# Altium PCB Preamp.PcbDoc
Units mm, origin at the board's own origin, x right, y up, seen from the top; angles counter-clockwise.
Board outline 41 x 29 mm, 2 copper layers (Top Layer, Bottom Layer); 41 components, 30 nets, 146 pads, 38 vias.
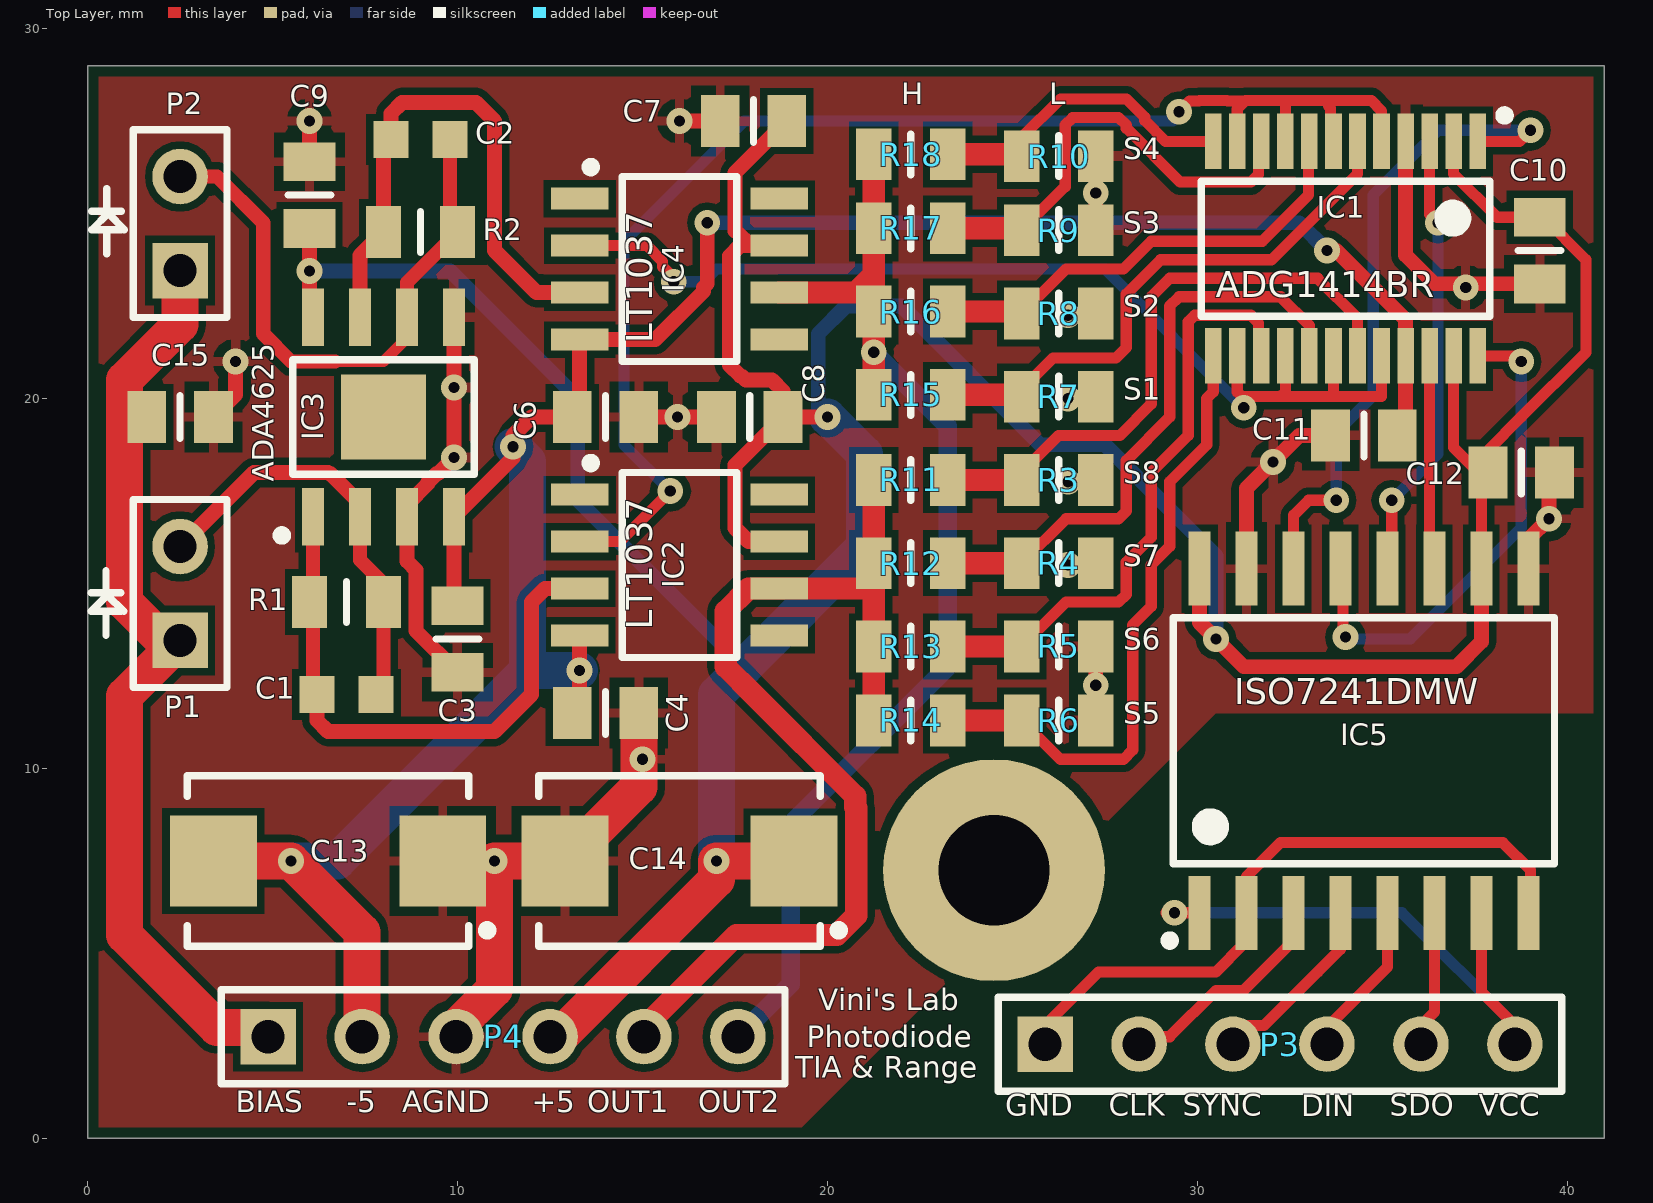
[diagram p0: Top Layer view]
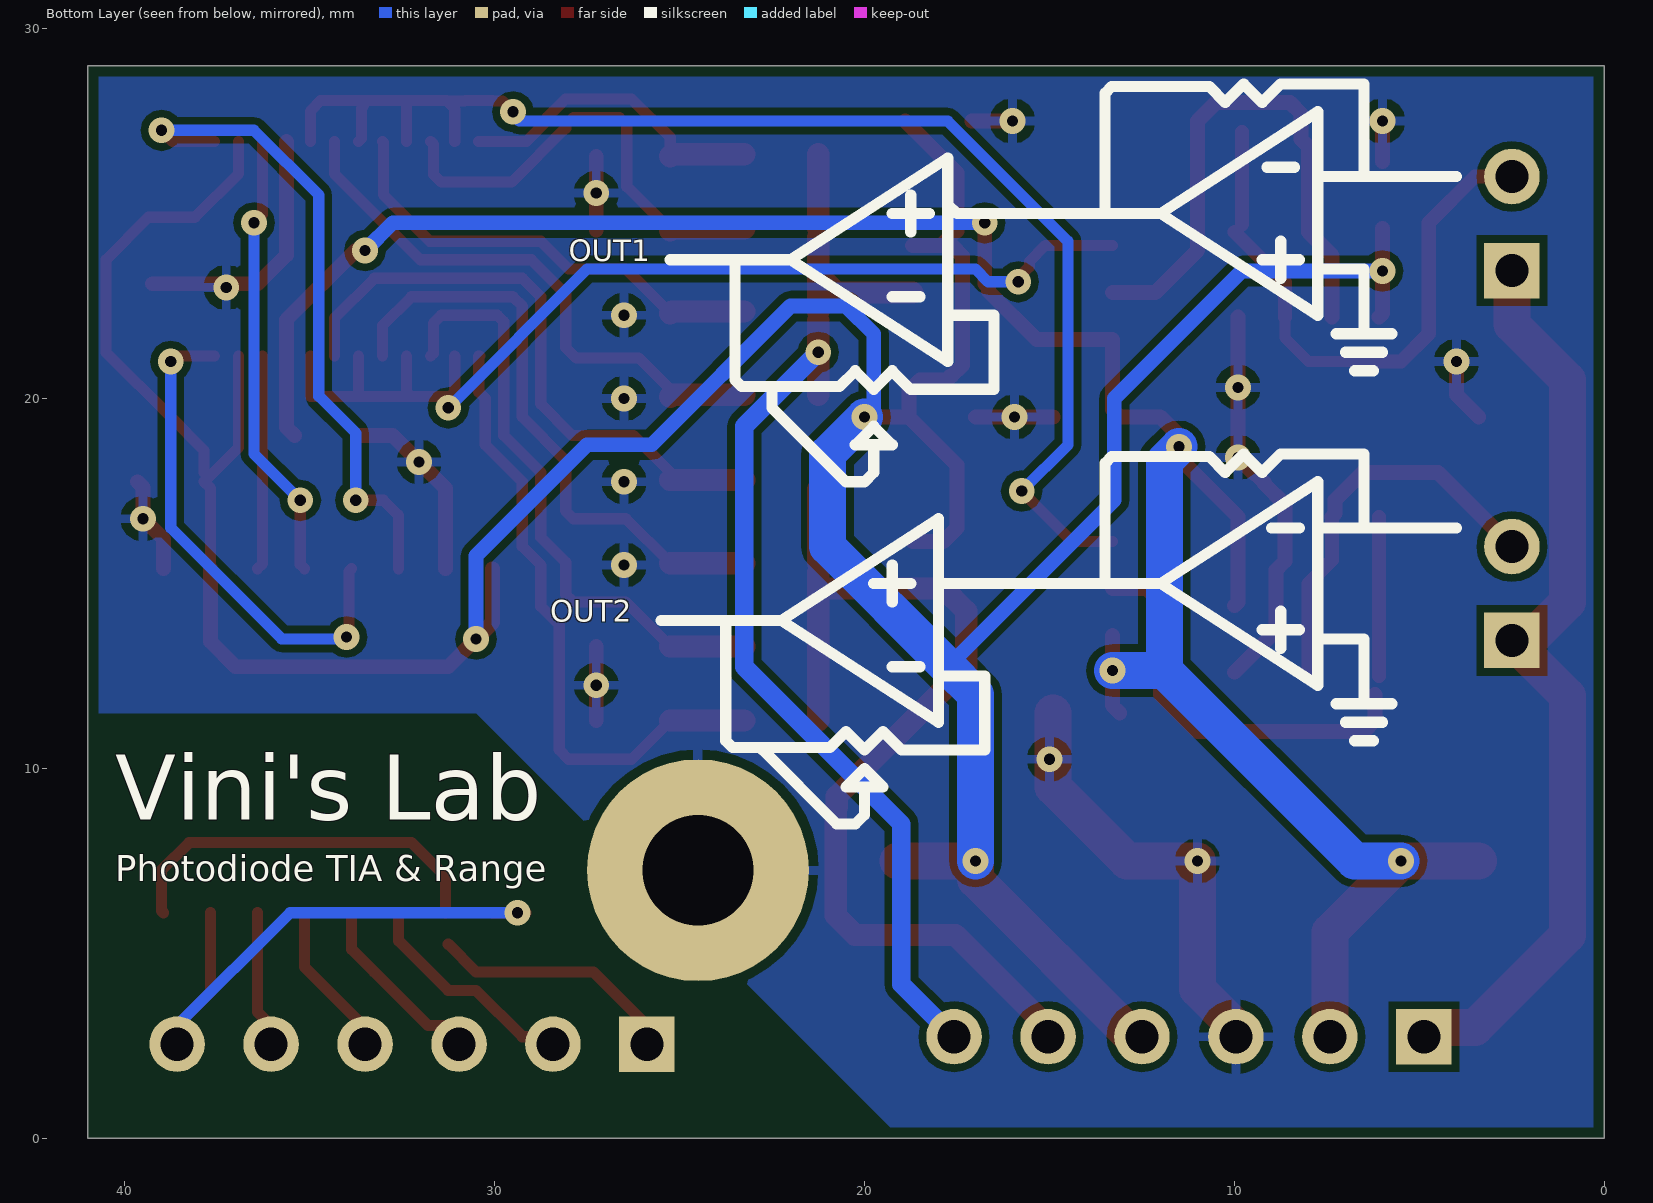
[diagram p1: Bottom Layer view, seen from below]
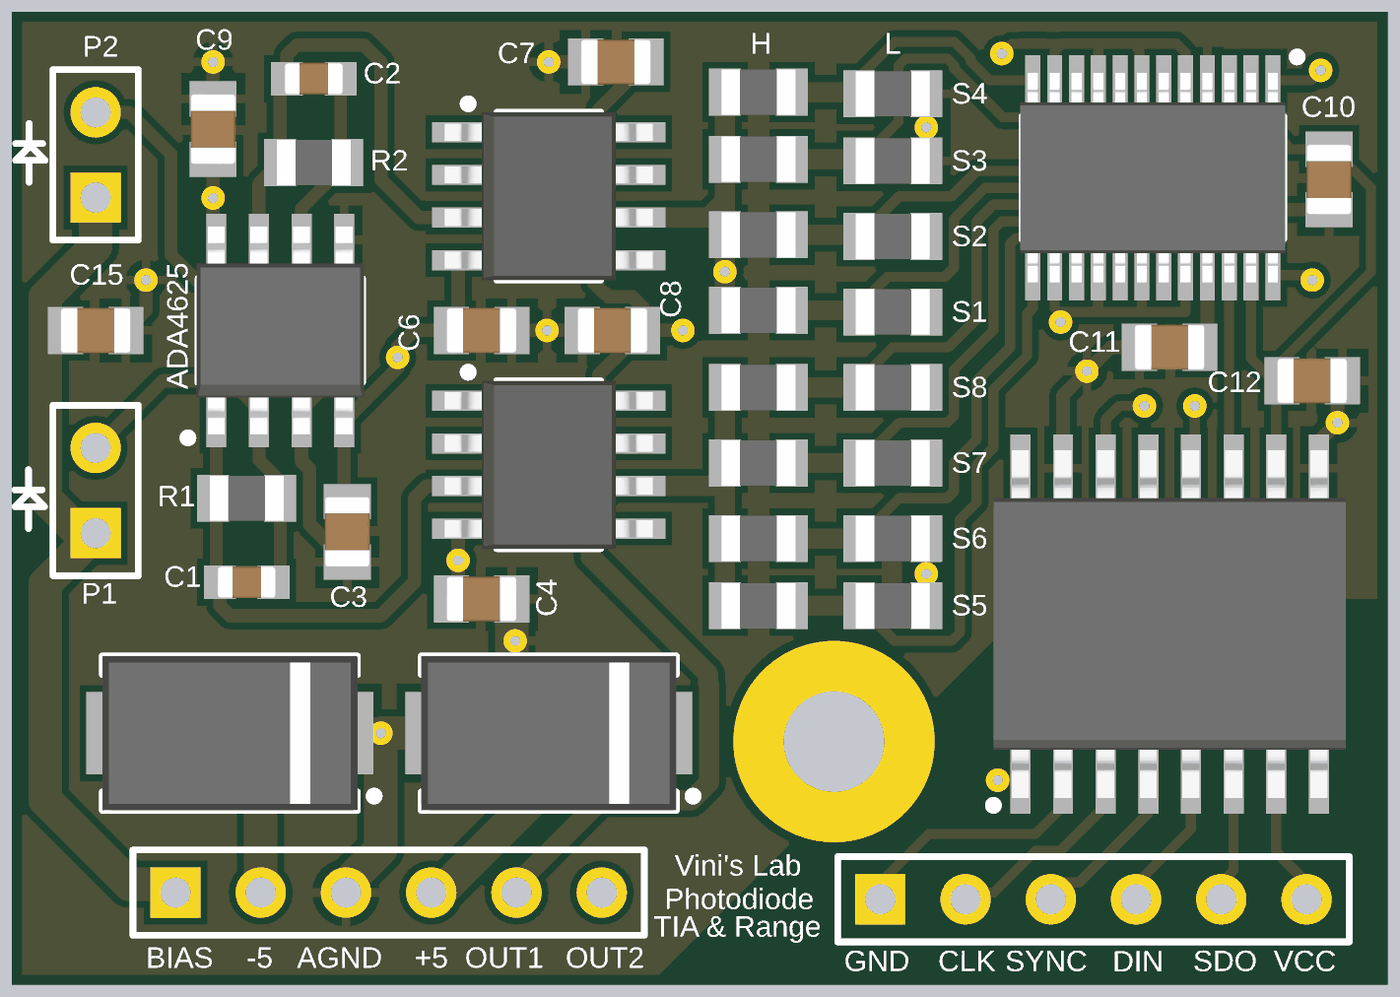
[diagram p2: 3D render of the assembled board from above, using the file's embedded part models]

## Layer stack, top to bottom
Top Solder: solder mask 0.0102, Solder Resist, Dk 3.5
Top Layer: signal copper 0.0356
Dielectric 1: dielectric 0.32, FR-4, Dk 4.8
Bottom Layer: signal copper 0.0356
Bottom Solder: solder mask 0.0102, Solder Resist, Dk 3.5

## Board outline
0,0 0,29 41,29 41,0

## Design rules (kind name [scope] priority, off if disabled: settings)
BoardOutlineClearance [All] p1: gap=0.3 ignorepadtopadclearanceinfootprint=FALSE
Clearance [All] p1: gap=0.2 ignorepadtopadclearanceinfootprint=FALSE
PolygonConnect [All] p1: connectstyle=Relief reliefconductorwidth=0.254 reliefentries=4 polygonreliefangle="90 Angle" airgapwidth=0.254
RoutingVias [All] p1: holewidth=0.711 width=1.27 viastyle="Through Hole" minholewidth=0.711 minwidth=1.27 maxholewidth=0.711 maxwidth=1.27
SolderMaskExpansion [All] p1: expansion=0 istentingtop=FALSE
Width [All] p1: maxlimit=1 minlimit=0.3 preferedwidth=0.4
30 further rules are at their usual default settings.

## Components (designator, comment, footprint, x,y, rotation, side; value= is the part's Value field where it differs from the comment)
C1 "1.2pF" CAPC1608X87N 7,12 r180 top
C2 "1.2pF" CAPC1608X87N 9,27 r180 top
C3 "100nF" CAPC2012X135N 10,13.5 r90 top
C4 "100nF" CAPC2012X135N 14,11.5 r180 top
C6 "100nF" CAPC2012X135N 14,19.5 r180 top
C7 "100nF" CAPC2012X135N 18,27.5 r0 top
C8 "100nF" CAPC2012X135N 17.9,19.5 r0 top
C9 "100nF" CAPC2012X135N 6,25.5 r270 top
C10 "100nF" CAPC2012X135N 39.25,24 r90 top
C11 "100nF" CAPC2012X135N 34.5,19 r0 top
C12 "100nF" CAPC2012X135N 38.75,18 r180 top
C13 "10uF" CAPMP7343X310N 6.5,7.5 r180 top
C14 "10uF" CAPMP7343X310N 16,7.5 r180 top
C15 "100nF" CAPC2012X135N 2.5,19.5 r0 top
IC1 "ADG1414BRUZ" SOP65P640X120-24N 34,24.05 r270 top
IC2 "LT1007CS8#PBF" SOIC127P600X175-8N 16,15.5 r0 top
IC3 "ADA4625-2ARDZ" SOIC127P600X175-9N-S229 8,19.5 r90 top
IC4 "LT1007CS8#PBF" SOIC127P600X175-8N 16,23.5 r0 top
IC5 "ISO7241MDW" SOIC127P1030X265-16N 34.5,10.75 r90 top
P1 "Header 2" HDR1X2 2.5,13.46 r90 top
P2 "Header 2" HDR1X2 2.5,23.46 r90 top
P3 "Header 6" HDR1X6 25.88,2.55 r0 top
P4 "Header 6" HDR1X6 4.88,2.75 r0 top
R1 "1k" RESC2012X60N 7,14.5 r180 top
R2 "1k" RESC2012X60N 9,24.5 r180 top
R3 "1k" RESC2012X60N 26.25,17.8 r0 top
R4 "1k" RESC2012X60N 26.25,15.55 r0 top
R5 "1k" RESC2012X60N 26.25,13.3 r0 top
R6 "1k" RESC2012X60N 26.25,11.3 r0 top
R7 "1k" RESC2012X60N 26.25,20.05 r0 top
R8 "1k" RESC2012X60N 26.25,22.3 r0 top
R9 "1k" RESC2012X60N 26.25,24.55 r0 top
R10 "1k" RESC2012X60N 26.25,26.55 r0 top
R11 "1k" RESC2012X60N 22.25,17.8 r0 top
R12 "1k" RESC2012X60N 22.25,15.55 r0 top
R13 "1k" RESC2012X60N 22.25,13.3 r0 top
R14 "1k" RESC2012X60N 22.25,11.3 r0 top
R15 "1k" RESC2012X60N 22.25,20.1 r0 top
R16 "1k" RESC2012X60N 22.25,22.35 r0 top
R17 "1k" RESC2012X60N 22.25,24.6 r0 top
R18 "1k" RESC2012X60N 22.25,26.6 r0 top

## Footprints (in the part's own frame and the unit in brackets; to place one, negate y for a bottom-side part, rotate by r counter-clockwise, add the part's x,y. Pads: shape width x height; smd on the part's side, far side on the other; paste and mask are expansions set on the pad)
CAPC1608X87N [mm] "Chip Capacitor, Body 1.6x0.8mm IPC Medium Density"
  rect 0.95x1 smd: 1(-0.8,0) 2(0.8,0)
  body extent -0.87,-0.47 0.88,0.48, height 0.87
CAPC2012X135N [mm] "Chip Capacitor, Body 2.0x1.25mm, IPC Medium Density"
  rect 1.05x1.4 smd: 1(-0.9,0) 2(0.9,0)
  silkscreen extent 0,-0.58 0,0.58, body extent -1.05,-0.67 1.05,0.68, height 1.25
CAPMP7343X310N [mm] "Capacitor, Polarized, Molded  Body 7.3x4.3mm, IPC Medium Density"
  rect 2.35x2.45 smd: 1(-3.1,0) 2(3.1,0)
  silkscreen extent -4.43,-2.3 3.8,2.3, body extent -3.8,-2.3 3.8,2.3, height 3.1
HDR1X2 [mm] "Connector; Header; 2 Position"
  rect 1.5x1.5 hole 0.9: 1(0,0)
  round 1.5 hole 0.9: 2(2.54,0)
  silkscreen extent -1.27,-1.27 3.81,1.27
HDR1X6 [mm] "Connector; Header; 6 Position"
  rect 1.5x1.5 hole 0.9: 1(0,0)
  round 1.5 hole 0.9: 2(2.54,0) 3(5.08,0) 4(7.62,0) 5(10.16,0) 6(12.7,0)
  silkscreen extent -1.27,-1.27 13.97,1.27
RESC2012X60N [mm] "Chip Resistor, EIA 0805, Metric 2012, Body 2.0x1.2mm, IPC Medium Density"
  rect 0.95x1.4 smd: 1(-1,0) 2(1,0)
  silkscreen extent 0,-0.55 0,0.55, body extent -1.1,-0.67 1.1,0.68, height 0.6
SOIC127P600X175-8N [mm] "SOIC 8, Pitch 1.27mm - Body 4x5mm, IPC Medium Density"
  rect 1.55x0.6 smd: 1(-2.7,1.905) 2(-2.7,0.635) 3(-2.7,-0.635) 4(-2.7,-1.905) 5(2.7,-1.905) 6(2.7,-0.635) 7(2.7,0.635) 8(2.7,1.905)
  silkscreen extent -2.52,-2.5 1.55,2.88, body extent -3.1,-2.5 3.1,2.5, height 1.75
SOIC127P600X175-9N-S229 [mm] "SOIC 8, 1.27mm Pitch; 8 pin, 3.90mm W X 4.90mm L X 1.75mm H body, (w/thermal tab 2.29mm X 2.29mm), IPC Medium Density"
  rect 1.55x0.6 smd: 1(-2.7,1.905) 2(-2.7,0.635) 3(-2.7,-0.635) 4(-2.7,-1.905) 5(2.7,-1.905) 6(2.7,-0.635) 7(2.7,0.635) 8(2.7,1.905)
  rect 2.29x2.29 smd: 9(0,0)
  silkscreen extent -3.32,-2.45 1.55,2.87, body extent -3.1,-2.5 3.1,2.5, height 1.75
SOIC127P1030X265-16N [mm] "SOIC, 1.27mm Pitch; 16 Pin, 7.50mm W X 10.3mm L X 2.65mm H body, IPC Medium Density"
  rect 2x0.6 smd: 1(-4.65,4.445) 2(-4.65,3.175) 3(-4.65,1.905) 4(-4.65,0.635) 5(-4.65,-0.635) 6(-4.65,-1.905) 7(-4.65,-3.175) 8(-4.65,-4.445) 9(4.65,-4.445) 10(4.65,-3.175) 11(4.65,-1.905) 12(4.65,-0.635) 13(4.65,0.635) 14(4.65,1.905) 15(4.65,3.175) 16(4.65,4.445)
  silkscreen extent -5.52,-5.15 3.32,5.37, body extent -5.18,-5.25 5.18,5.25, height 1.68
SOP65P640X120-24N [mm] "SOP, 0.65mm Pitch; 24 Pin, 4.40mm W X 7.80mm L X 1.20mm H Body, IPC Medium Density"
  rect 1.5x0.45 smd: 1(-2.9,3.575) 2(-2.9,2.925) 3(-2.9,2.275) 4(-2.9,1.625) 5(-2.9,0.975) 6(-2.9,0.325) 7(-2.9,-0.325) 8(-2.9,-0.975) 9(-2.9,-1.625) 10(-2.9,-2.275) 11(-2.9,-2.925) 12(-2.9,-3.575) 13(2.9,-3.575) 14(2.9,-2.925) 15(2.9,-2.275) 16(2.9,-1.625) 17(2.9,-0.975) 18(2.9,-0.325) 19(2.9,0.325) 20(2.9,0.975) 21(2.9,1.625) 22(2.9,2.275) 23(2.9,2.925) 24(2.9,3.575)
  silkscreen extent -3.72,-3.9 1.83,4.43, body extent -3.12,-3.95 3.12,3.95, height 1.2

## Part data
C1 C2: library part CC0603_1.2PF_50V_0.25PF_NP0, "Non-polarised capacitor", Case=0603, Manufacturer=GENERIC, Manufacturer1 ComponentHeight=0.87mm, Manufacturer1 Example=PHYCOMP, Manufacturer1 Part Number=223886715128, Tolerance=±0.25pF, Voltage=50V, Author="CERN DEM JLC", Component Type=Standard, CreateDate=12/3/2007, HelpURL=\\cern.ch\dfs\Applications\Altium\Datasheets\CC0603_NP0_PHYCOMP.pdf, LatestRevisionDate=12/3/2007, Manufacturer Part Number=CC0603_1.2PF_50V_0.25PF_NP0, Mounted=Yes, Part Description="SMD Multilayer Chip Ceramic Capacitor", Part Number=CC0603_1.2PF_50V_0.25PF_NP0, Pin Count=2, Sense=No, SMD=Yes, Socket=No, Status=Preferred, TC=C0G/NP0
C3 C4 C6 C7 C8 C9 C10 C11 C12 C15: library part CC0805_100NF_50V_10%_X7R, "Non-polarised capacitor", Case=0805, Manufacturer=GENERIC, Manufacturer1 ComponentHeight=1mm, Manufacturer1 Example=TDK, Manufacturer1 Part Number=C2012X7R1H104K085AA, Tolerance=±10%, Voltage=50V, Author="CERN DEM JLC", Component Type=Standard, CreateDate=12/3/2007, HelpURL=\\cern.ch\dfs\Applications\Altium\Datasheets\CC0805_X7R_TDK_C.pdf, LatestRevisionDate=4/22/2015, Manufacturer Part Number=CC0805_100NF_50V_10%_X7R, Mounted=Yes, Part Description="SMD Multilayer Chip Ceramic Capacitor", Part Number=CC0805_100NF_50V_10%_X7R, Pin Count=2, Sense=No, SMD=Yes, Socket=No, Status=Preferred, TC=X7R
C13 C14: library part CTE7343-31_10UF_25V_10%, "Polarised capacitor", Case=D, Manufacturer=GENERIC, Manufacturer1 ComponentHeight=3.1mm, Manufacturer1 Example=AVX, Manufacturer1 Part Number=TAJD106K025R, Tolerance=±10%, Voltage=25V, Author="CERN DEM JMW", Component Type=Standard, CreateDate=10/17/2008, HelpURL=\\cern.ch\dfs\Applications\Altium\Datasheets\CTE_AVX_TAJ.pdf, LatestRevisionDate=10/17/2008, Manufacturer Part Number=CTE7343-31_10UF_25V_10%, Mounted=Yes, Part Description="Solid Tantalum Chip Capacitor", Part Number=CTE7343-31_10UF_25V_10%, Pin Count=2, Sense=No, SMD=Yes, Socket=No, Status=Preferred
IC1: "9.5 Ohm ON Resistance, ±15 V/+12 V/±5 V iCMOS,  Serially-Controlled Octal SPST Switches", Case=TSSOP24, Manufacturer="ANALOG DEVICES", Author="CERN DEM MR", Bonding=No, Component Type=Standard, ComponentHeight=1.2mm, CreateDate=10/21/2016, Device=ADG1414BRUZ, HelpURL=\\cern.ch\dfs\Applications\Altium\Datasheets\ADG1414BRUZ.pdf, LatestRevisionDate=10/21/2016, Manufacturer Part Number=ADG1414BRUZ, Mounted=Yes, PackageDescription="SOP, 0.65mm Pitch; 24 Pin, 4.40mm W X 7.80mm L X 1.20mm H body, IPC Medium Density", Part Description="9.5 Ohm ON Resistance, ±15 V/+12 V/±5 V iCMOS,  Serially-Controlled Octal SPST Switches", Part Number=ADG1414BRUZ, Pin Count=24, PressFit=No, Sense=No, SMD=Yes, Socket=No
IC2 IC4: "Operational Amplifier with Offset 1-8", Case=SOIC8, Manufacturer="LINEAR TECHNOLOGY", Author="CERN DEM JLC", Bonding=No, Component Type=Standard, ComponentHeight=1.75mm, CreateDate=3/9/2011, Device=LT1007CS8#PBF, HelpURL=\\cern.ch\dfs\Applications\Altium\Datasheets\LT1007CS8#PBF.pdf, LatestRevisionDate=3/9/2011, Manufacturer Part Number=LT1007CS8#PBF, Mounted=Yes, PackageDescription="SOIC 8, Pitch 1.27mm - Body 4x5mm, IPC Medium Density", Part Description="Low Noise, High Speed Precision Operational Amplifier", Part Number=LT1007CS8#PBF, Pin Count=7, PressFit=No, Sense=No, SMD=Yes, Socket=No
IC3: "Dual Operational Amplifier", Case=SOIC8, Manufacturer="ANALOG DEVICES", Author="CERN DEM BC", Bonding=No, Component Type=Standard, ComponentHeight=1.75mm, CreateDate=10/22/2019, Device=ADA4625-2ARDZ, HelpURL=\\cern.ch\dfs\Applications\Altium\Datasheets\ADA4625-2ARDZ.pdf, LatestRevisionDate=10/22/2019, Manufacturer Part Number=ADA4625-2ARDZ, Mounted=Yes, PackageDescription="SOIC, 1.27mm Pitch; 8 Pin, 3.90mm W X 4.90mm L X 1.75mm H body (w/Thermal Tab 2.29 X 2.29mm), IPC Medium Density", Part Description="Dual, 36V, 18MHz, Low Noise, Fast Settling, Single Supply, RRO, JFET Operational Amplifier", Part Number=ADA4625-2ARDZ, Pin Count=8, PressFit=No, Sense=No, SMD=Yes, Socket=No
IC5: "Quad Channel, 150Mbps, Digital Isolator", Case=SOIC16W, Manufacturer="TEXAS INSTRUMENTS", Author="CERN DEM BC", Bonding=No, Component Type=Standard, ComponentHeight=2.65mm, CreateDate=3/9/2020, Device=ISO7241MDW, HelpURL=\\cern.ch\dfs\Applications\Altium\Datasheets\ISO7241MDW.pdf, LatestRevisionDate=3/9/2020, Manufacturer Part Number=ISO7241MDW, Mounted=Yes, PackageDescription="SOIC, 1.27mm Pitch; 16 Pin, 7.50mm W X 10.3mm L X 2.65mm H body, IPC Medium Density", Part Description="Quad Channel (3/1 Channel Directionality), 150Mbps, Digital Isolator", Part Number=ISO7241MDW, Pin Count=16, PressFit=No, Sense=No, SMD=Yes, Socket=No
P1 P2: "Header, 2-Pin", LatestRevisionDate=17-Jul-2002, LatestRevisionNote="Re-released for DXP Platform.", Publisher="Altium Limited"
P3 P4: "Header, 6-Pin", LatestRevisionDate=17-Jul-2002, LatestRevisionNote="Re-released for DXP Platform.", Publisher="Altium Limited"
R1 R2 R3 R4 R5 R6 R7 R8 R9 R10 R11 R12 R13 R14 R15 R16 R17 R18: library part R0805_1K_0.1%_0.1W_10PPM, "Resistor - 0.1%", Case=0805, Manufacturer=GENERIC, Manufacturer1 ComponentHeight=0.6mm, Manufacturer1 Example="TYCO HOLSWORTHY", Manufacturer1 Part Number=RN73C2A1K0BTG, Power=0.1W, Tolerance=±0.1%, Author="CERN DEM JLC", Component Type=Standard, CreateDate=5/28/2013, HelpURL=\\cern.ch\dfs\Applications\Altium\Datasheets\R0805_TYCO_RN73.pdf, LatestRevisionDate=5/28/2013, Manufacturer Part Number=R0805_1K_0.1%_0.1W_10PPM, Mounted=Yes, Part Description="Thin Film Chip Resistor", Part Number=R0805_1K_0.1%_0.1W_10PPM, Pin Count=2, PressFit=No, Sense=No, SMD=Yes, Socket=No, Status="Not Recommended", TC=±10ppm

## Free pads (board coordinates)
  round 6 hole 3: 2(24.5,7.25)

## Via types
v1: diameter 0.7, hole 0.3, Top Layer to Bottom Layer, 38 vias

## Nets (pads, with @x,y where several pads share a name; then routed paths per layer and width w, separated by ;. In a path a pad name is that pad's centre, name@x,y a point inside that pad or via, vN(x,y) a via of type N, cw(c..) or ccw(c..) an arc to the next point about the centre after c; other vN are vias at no path point)
+5: C7.2 C8.2 C9.2 C10.2 C12.2 C14.1 IC1.2 IC1.23 IC2.7 IC3.8 IC4.7 IC5.10 IC5.16 P4.4 | length 109.2
  Top Layer w0.3: IC1.23 36.925,18.675 37.85,17.75 37.675,17.575 IC5.10 ; IC1.2 36.925,26.075 38.1,24.9 C10.2 39.35,24.9 40.5,23.75 40.5,21.25 38.75,19.5 37.85,18.6 C12.2
  Top Layer w0.4: C9.2 v1(6,23.448) 6,22.295 IC3.8 ; IC2.7 17.865,16.135 17.5,16.5 17.5,18.2 C8.2 ; IC4.7 IC4.7@17.925,24.135 ; C7.2 17.5,26.1 17.5,24.525 17.536,24.525 IC4.7@17.925,24.135 ; v1(20,19.5) C8.2 ; IC5.16 30.055,13.945 31.25,12.75 37,12.75 37.675,13.425 IC5.10 ; IC4.7@17.925,24.135 17.635,24.135 17.35,23.85 17.35,20.9 17.65,20.6 17.691,20.6 17.791,20.5 18.5,20.5 18.8,20.2 C8.2
  Top Layer w1: P4.4 12.75,2.75 17,7 v1(17,7.5) C14.1
  Bottom Layer w0.4: v1(6,23.448) 9.802,23.448 13.25,20 13.25,17.25 17.75,12.75 ; v1(20,19.5) 19.75,19.5 19.75,21.75 20.5,22.5 22,22.5 25.75,18.75 27.5,18.75 30.5,15.75 v1(30.5,13.5)
  Bottom Layer w1: v1(17,7.5) 17,12 17.75,12.75 21,16 21,18.5 v1(20,19.5)
-5: C3.2 C4.2 C6.2 C11.2 C13.2 IC1.21 IC2.4 IC3.4 IC4.4 P4.2 | length 64
  Top Layer w0.4: C3.2 9.905,14.495 IC3.4 11.5,18.395 v1(11.5,18.698) 11.5,19 12,19.5 C6.2 13.3,19.7 IC4.4 15.345,21.595 16.65,22.9 16.65,23 16.75,23.1 v1(16.75,24.75) ; C4.2 13.3,11.7 v1(13.3,12.648) IC2.4 ; v1(33.5,24) 33.75,24 35.625,22.125 IC1.21 35.625,19.225 C11.2
  Top Layer w1: C13.2 v1(5.5,7.5) 7.42,5.58 P4.2@7.42,3
  Bottom Layer w0.4: v1(16.75,24.75) 32.75,24.75 v1(33.5,24)
  Bottom Layer w1: v1(5.5,7.5) 6.75,7.5 11.897,12.648 ; v1(11.5,18.698) 11.897,18.3 11.897,12.648 ; v1(13.3,12.648) 11.897,12.648
AGND: C3.1 C4.1 C6.1 C7.1 C8.1 C9.1 C10.1 C11.1 C12.1 C13.1 C14.2 C15.2 IC1.4 IC3.3 IC3.5 IC5.9 IC5.15 P4.3 pad.2 R3.2 R4.2 R5.2 R6.2 R7.2 R8.2 R9.2 R10.2 | length 47.1
  Top Layer w0.4: C15.2 4,20.1 v1(4,21) ; C9.1 v1(6,27.5) ; IC3.5 v1(9.905,18.405) 9.475,17.975 9.439,17.975 9.205,17.741 9.205,17.705 8.635,17.135 IC3.3 8.635,15.6 8.641,15.6 8.875,15.366 8.875,13.725 C3.1 ; C6.1 C8.1 ; v1(16,27.5) C7.1 ; R6.2 R5.2 ; R9.2 R10.2 ; IC5.15 31.325,17.575 32.75,19 C11.1 ; IC1.4 35.625,23.875 36.4,23.1 C10.1 ; IC5.9 38.945,16.195 v1(39.5,16.75) 39.5,17.6 C12.1@39.65,17.75
  Top Layer w1: P4.3@9.96,3 11,4.04 v1(11,7.5) C14.2 14.9,9.5 C4.1
  other v1: 15,10.25 27.25,12.25 26.5,15.5 26.5,17.75 32.038,18.287 15.95,19.5 26.5,20 9.905,20.303 26.5,22.25 37.25,23 27.25,25.55
BIAS: C15.1 P1.1 P2.1 P4.1 | length 25
  Top Layer w1: P2.1 2.5,22 1,20.5 1,14.5 2.04,13.46 P1.1 1,11.96 1,5.5 3.5,3 P4.1@4.88,3
CLK: IC5.3 P3.2 | length 6
  Top Layer w0.3: P3.2@28.42,2.75 29.25,2.75 30.5,4 31.25,4 32.595,5.345 IC5.3
DIN: IC5.5 P3.4 | length 3.8
  Top Layer w0.3: P3.4@33.5,3.05 33.55,3.05 35.135,4.635 IC5.5
GND: IC5.2 IC5.8 P3.1 | length 16.8
  Top Layer w0.3: P3.1@25.88,3.05 27.33,4.5 30.5,4.5 IC5.2@31.25,5.25 ; IC5.2 31.325,7.075 32.25,8 38.25,8 39,7.25 39,6.155 IC5.8
NetC1_1: C1.1 IC3.2 P1.2 R1.1 | length 11
  Top Layer w0.381: IC3.2 7.365,15.635 8,15 R1.1 8,12.5
  Top Layer w0.4: P1.2 4.5,18 6.5,18 6.525,17.975 6.561,17.975 6.795,17.741 7.108,17.428 7.282,17.254 7.282,16.883 IC3.2
NetC1_2: C1.2 IC2.3 IC3.1 R1.2 | length 15.3
  Top Layer w0.381: 6.095,12.5 IC3.1
  Top Layer w0.4: C1.2 6.2,11.3 6.5,11 11,11 12,12 12,14.5 12.365,14.865 IC2.3
NetC2_1: C2.1 IC3.6 P2.2 R2.1 | length 16.2
  Top Layer w0.3: 6.692,21 8,21 8.635,21.635 IC3.6
  Top Layer w0.381: P2.2 3.5,26 4.75,24.75 4.75,21.75 5.5,21 6.692,21 ; IC3.6 8.635,23.135 R2.1 ; R2.1@9.8,24.7 C2.1 C2.1@9.8,27.2
NetC2_2: C2.2 IC3.7 IC4.3 R2.2 | length 15.2
  Top Layer w0.4: IC3.7 7.365,23.865 R2.2 8,26.8 C2.2 8.2,27.7 8.5,28 10.5,28 11,27.5 11,24 12.135,22.865 IC4.3
NetIC1_1: IC1.1 IC5.14 | length 18
  Top Layer w0.3: IC5.14 32.595,16.845 33,17.25 v1(33.75,17.25) ; IC1.1 38.7,26.95 v1(39,27.25)
  Bottom Layer w0.3: v1(33.75,17.25) 33.75,19.063 34.75,20.062 34.75,21.688 34.75,25.5 36.5,27.25 v1(39,27.25)
NetIC1_3: IC1.3 IC5.12 | length 12.2
  Top Layer w0.3: IC5.12 35.25,15.515 v1(35.25,17.25) ; IC1.3 36.275,24.975 v1(36.5,24.75)
  Bottom Layer w0.3: v1(35.25,17.25) 36.5,18.5 v1(36.5,24.75)
NetIC1_5: IC1.5 IC1.7 IC1.9 IC1.11 IC2.2 | length 36.8
  Top Layer w0.3: IC2.2 14.385,16.135 v1(15.75,17.5) ; v1(29.5,27.75) 29.787,28.038 30.043,28.038 30.055,28.05 30.795,28.05 30.807,28.038 31.288,28.038 ; IC1.11 31.075,27.825 31.288,28.038 ; IC1.9 32.375,28.05 ; IC1.7 33.6,27.025 33.6,27.845 33.538,27.907 33.538,28.05 ; IC1.5 34.975,27.775 34.7,28.05 33.538,28.05 ; 31.288,28.038 31.3,28.05 32.375,28.05 ; 32.375,28.05 33.538,28.05
  Bottom Layer w0.3: v1(15.75,17.5) 14.5,18.75 14.5,24.25 17.75,27.5 29.344,27.5 29.5,27.656 v1(29.5,27.75)
NetIC1_6: IC1.6 R7.1 R15.2 | length 15.4
  Top Layer w0.3: R7.1 25.25,20.25 26.1,21.1 27.8,21.1 28.075,21.375 28.075,22.825 29,23.75 32,23.75 34.325,26.075 IC1.6
  Top Layer w0.6: R15.2 25.2,20.1 R7.1
NetIC1_8: IC1.8 R8.1 R16.2 | length 12.6
  Top Layer w0.3: R8.1 26.45,23.5 28,23.5 28.75,24.25 31.75,24.25 33,25.5 33,26.925 IC1.8
  Top Layer w0.6: R16.2 25.2,22.35 R8.1
NetIC1_10: IC1.10 R9.1 R17.2 | length 12.5
  Top Layer w0.3: R9.1 26.425,25.725 26.425,27.395 26.63,27.6 27.87,27.6 28.075,27.395 28.075,27.306 29.531,25.85 31.445,25.85 31.65,26.055 31.65,26.875 IC1.10
  Top Layer w0.6: R17.2 25.2,24.6 R9.1
NetIC1_12: IC1.12 R10.1 R18.2 | length 8.7
  Top Layer w0.3: R10.1 25.25,27.05 26.3,28.1 27.989,28.1 28.077,28.1 28.575,27.602 28.575,27.514 29.139,26.95 IC1.12
  Top Layer w0.6: R18.2 25.2,26.6 R10.1
NetIC1_13: IC1.13 R6.1 R14.2 | length 17.1
  Top Layer w0.3: R6.1 26.3,10.25 28,10.25 28.25,10.5 28.25,13.875 28.75,14.375 28.75,15.5 29.25,16 29.25,17.75 30.25,18.75 30.25,20 30.425,20.175 IC1.13 IC1.13@30.4,21.15
  Top Layer w0.6: R14.2 R6.1
NetIC1_14: IC1.14 IC1.16 IC1.18 IC1.20 IC4.2 | length 28.5
  Top Layer w0.3: IC4.2 15.115,24.135 15.545,23.705 15.545,23.563 15.845,23.264 v1(15.845,23.155) ; IC1.14 31.075,20.175 31.2,20.05 32.25,20.05 ; IC1.16 32.375,20.175 32.25,20.05 ; IC1.18 33.675,20.112 33.613,20.05 ; IC1.20 34.975,20.05 33.613,20.05 ; 32.25,20.05 33.613,20.05
  Bottom Layer w0.3: v1(15.845,23.155) 16.655,23.155 17,23.5 24,23.5 27.5,23.5 v1(31.25,19.75)
NetIC1_15: IC1.15 R5.1 R13.2 | length 16.5
  Top Layer w0.3: R5.1 26.45,14.5 27.87,14.5 28.075,14.705 28.075,15.575 28.75,16.25 28.75,18 29.75,19 29.75,22.074 29.926,22.25 31.445,22.25 31.65,22.045 31.65,21.225 IC1.15
  Top Layer w0.6: R13.2 R5.1
NetIC1_17: IC1.17 R4.1 R12.2 | length 16.5
  Top Layer w0.3: R4.1 26.45,16.75 27.87,16.75 28.075,16.955 28.075,18.325 29.25,19.5 29.25,22.5 29.5,22.75 32.25,22.75 33.025,21.975 IC1.17
  Top Layer w0.6: R12.2 R4.1
NetIC1_19: IC1.19 R3.1 R11.2 | length 16.6
  Top Layer w0.3: R3.1 25.25,18 26.25,19 27.9,19 28.75,19.85 28.75,22.75 29.25,23.25 33.25,23.25 34.325,22.175 IC1.19
  Top Layer w0.6: R11.2 R3.1
NetIC1_22: IC1.22 IC5.11 | length 5.8
  Top Layer w0.3: IC1.22 36.275,15.53 IC5.11
NetIC1_24: IC1.24 IC5.13 | length 13.7
  Top Layer w0.3: IC5.13 33.933,15.332 33.933,13.618 v1(34,13.55) ; IC1.24 38.6,21.15 v1(38.75,21)
  Bottom Layer w0.3: v1(34,13.55) 34.05,13.5 35.75,13.5 38.75,16.5 v1(38.75,21)
OUT1: IC2.6 P4.5 R11.1 R12.1 R13.1 R14.1 | length 27
  Top Layer w0.6: P4.5@15.04,3 17.54,5.5 20.25,5.5 20.775,6.025 20.775,8.932 20.75,8.957 20.75,9.25 18,12 17.25,12.75 17.25,14.25 17.865,14.865 IC2.6 21.085,14.865 21.135,14.915 21.25,14.8 ; R14.1 R13.1 21.25,14.8 ; R12.1@21.25,15.3 21.25,14.8 ; R12.1 R11.1@21.25,17.55
OUT2: IC4.6 P4.6 R15.1 R16.1 R17.1 R18.1 | length 30.4
  Top Layer w0.6: IC4.6 20.765,22.865 21.25,23.35 ; R15.1 R16.1@21.25,22.1 ; R16.1 21.25,23.35 ; R17.1@21.25,24.35 21.25,23.35 ; R17.1 R18.1
  Bottom Layer w0.5: P4.6 19,4.17 19,8.5 23.25,12.75 23.25,19.25 v1(21.25,21.25)
SDO: IC5.6 P3.5 | length 3.2
  Top Layer w0.3: P3.5@36.04,3.05 36.405,3.415 IC5.6
SYNC: IC5.4 P3.3 | length 4.7
  Top Layer w0.3: P3.3@30.96,3.05 31.8,3.05 33.25,4.5 33.865,5.115 IC5.4
VDIG: IC5.1 IC5.7 P3.6 | length 15
  Top Layer w0.3: v1(29.376,6.1) 29.15,6.1 IC5.1 ; IC5.7 37.675,3.955 P3.6@38.58,3.05
  Bottom Layer w0.3: v1(29.376,6.1) 35.53,6.1 P3.6@38.58,3.05
pads on no net: IC2.1 IC2.5 IC2.8 IC3.9 IC4.1 IC4.5 IC4.8

## Polygon pours and split planes (outlines as drawn)
AGND on Bottom Layer "AGND_L02_P000" (solid, remove dead copper, pour order 0): 0,29 0,0 19,0 30.5,11.5 41,11.5 41,29
AGND on Top Layer "AGND_L01_P001" (solid, remove dead copper, pour order 1): 0,0 0,29 41,29 41,11.5 30.5,11.5 19,0

## Silkscreen, mask and mechanical layers (free items; w line width, h text height)
Top Overlay:
  lines w0.2: 0.1,14.75 0.9,14.75 ; 0.119,25.067 0.919,25.067 ; 0.5,13.6 0.5,14.25 ; 0.5,14.75 0.5,15.35 ; 0.519,23.917 0.519,24.567 ; 0.519,25.067 0.519,25.667 ; 0.9,14.25 0.1,14.25 0.537,14.687 0.975,14.25 ; 0.919,24.567 0.119,24.567 0.556,25.005 0.994,24.567
  text "H" at 22,27.75 h1
  text "L" at 26,27.75 h1
  text "S4" at 28,26.261 h1
  text "S3" at 28,24.261 h1
  text "ADG1414BR" at 30.5,22.513 h1.2
  text "S2" at 28,22.011 h1
  text "LT1037" at 15.487,21.5 h1.2 r90
  text "S1" at 28,19.761 h1
  text "ADA4625" at 5.239,17.75 h1 r90
  text "S8" at 28,17.511 h1
  text "S7" at 28,15.261 h1
  text "LT1037" at 15.487,13.75 h1.2 r90
  text "S6" at 28,13.011 h1
  text "ISO7241DMW" at 31,11.513 h1.2
  text "S5" at 28,11.011 h1
  text "Vini's Lab" at 19.751,3.26 h1
  text "Photodiode" at 19.445,2.26 h1
  text "TIA & Range" at 19.124,1.438 h1
  text "BIAS" at 4,0.511 h1
  text "-5" at 7,0.511 h1
  text "AGND" at 8.5,0.511 h1
  text "+5" at 12,0.511 h1
  text "OUT1" at 13.5,0.511 h1
  text "OUT2" at 16.5,0.511 h1
  text "GND" at 24.8,0.411 h1
  text "CLK" at 27.6,0.411 h1
  text "SYNC" at 29.6,0.411 h1
  text "DIN" at 32.8,0.4 h1
  text "SDO" at 35.2,0.411 h1
  text "VCC" at 37.601,0.411 h1
Bottom Overlay:
  lines w0.3: 4,16.5 7.75,16.5 6.5,16.5 6.5,18.5 8.75,18.5 9.25,18 9.75,18.5 10.25,18 10.679,18.429 10.975,18.429 13.321,18.429 13.5,18.25 13.5,15 ; 4,26 7.75,26 ; 5.75,11.75 7.25,11.75 ; 5.75,21.75 7.25,21.75 ; 6,11.25 7,11.25 ; 6,21.25 7,21.25 ; 6.25,10.75 6.75,10.75 ; 6.25,20.75 6.75,20.75 ; 6.5,11.75 6.5,13.5 7.75,13.5 ; 6.5,21.75 6.5,23.5 7.75,23.5 ; 6.5,26 6.5,28.5 8.75,28.5 9.25,28 9.75,28.5 10.25,28 10.679,28.429 10.975,28.429 13.321,28.429 13.5,28.25 13.5,25 ; 8.25,13.75 9.25,13.75 ; 8.25,16.5 9,16.5 ; 8.25,23.75 9.25,23.75 ; 8.375,26.25 9.125,26.25 ; 8.75,13.25 8.75,14.25 ; 8.75,23.25 8.75,24.25 ; 15.25,15 12,15 ; 15.25,25 12,25 ; 17.75,22.25 16.5,22.25 16.5,20.25 18.75,20.25 19.25,20.75 19.75,20.25 20.25,20.75 20.679,20.321 20.975,20.321 23.321,20.321 23.5,20.5 23.5,23.75 22,23.75 ; 17.75,25.25 17.5,25 12,25 ; 18,12.5 16.75,12.5 16.75,10.5 19,10.5 19.5,11 20,10.5 20.5,11 20.929,10.571 21.225,10.571 23.571,10.571 23.75,10.75 23.75,14 ; 18,15 12,15 ; 18.25,25 19.25,25 ; 18.5,12.75 19.25,12.75 ; 18.5,22.75 19.25,22.75 ; 18.75,15 19.75,15 ; 18.75,24.5 18.75,25.5 ; 19.25,14.5 19.25,15.5 ; 22.5,20.25 22.5,19.75 20.5,17.75 20,17.75 19.75,18 19.75,18.75 ; 22.75,10.5 20.75,8.5 20.25,8.5 20,8.75 20,9.5 ; 25.25,23.75 22,23.75 ; 25.5,14 22.25,14 ; 12,15 7.75,12.25 7.75,17.75 12,15 ; 12,25 7.75,27.75 7.75,22.25 12,25 ; 19.75,18.75 20.25,18.75 19.75,19.25 ; 19.75,18.75 19.25,18.75 19.75,19.25 ; 19.75,19.25 19.75,19.25 ; 20,9.5 19.5,9.5 20,10 20.5,9.5 20,9.5 ; 22,23.75 17.75,21 17.75,26.5 22,23.75 ; 22.25,14 18,11.25 18,16.75 22.25,14
  text "OUT1" at 28,23.511 h1
  text "OUT2" at 28.5,13.761 h1
  text "Vini's Lab" at 40.247,8.031 h3
  text "Photodiode TIA & Range" at 40.25,6.725 h1.2
Mechanical 1:
  the board outline again, w0.6